# Altium PCB T_BIAS.PcbDoc
Units mm, origin at the board's own origin, x right, y up, seen from the top; angles counter-clockwise.
Board outline 15.11 x 16.64 mm, 2 copper layers (Top Layer, Bottom Layer), stack 0.871 mm thick; 2 components, 3 nets, 5 pads, 17 vias.
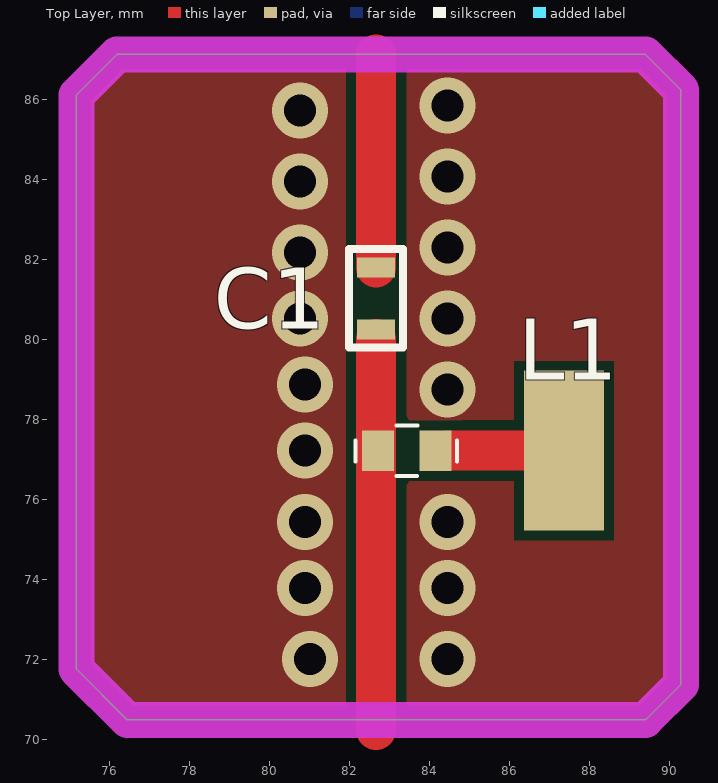
[diagram p0: Top Layer view]
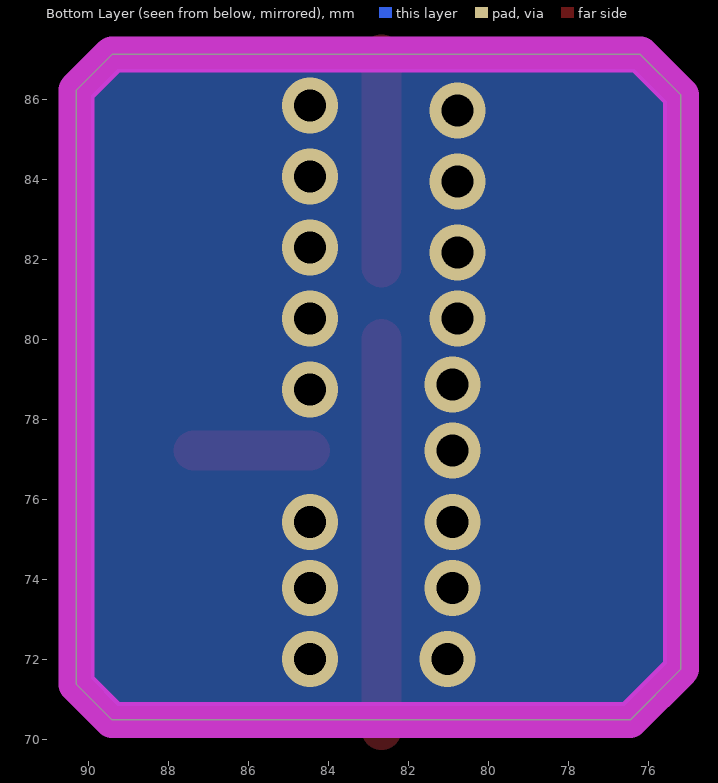
[diagram p1: Bottom Layer view, seen from below]

## Layer stack, top to bottom
Top Solder: solder mask 0.0102, Solder Resist, Dk 3.5
Top Layer: signal copper 0.0356
Dielectric 1: dielectric 0.8, FR-4, Dk 4.8
Bottom Layer: signal copper 0.0356
Bottom Solder: solder mask 0.0102, Solder Resist, Dk 3.5

## Board outline
75.184,71.755 75.184,86.106 76.2,87.122 89.408,87.122 90.297,86.233 90.297,71.374 89.408,70.485 76.454,70.485

## Design rules (kind name [scope] priority, off if disabled: settings)
Clearance Clearance_3 [OnLayer('Bottom Layer') vs OnLayer('Keep-Out Layer')] p1: gap=-0.1 ignorepadtopadclearanceinfootprint=FALSE
Clearance Clearance_2 [OnLayer('Top Layer') vs OnLayer('Keep-Out Layer')] p2: gap=-0.1 ignorepadtopadclearanceinfootprint=FALSE
Clearance Clearance_1 [InNetClass('RF') vs OnLayer('Keep-Out Layer')] p3: gap=-0.1 ignorepadtopadclearanceinfootprint=FALSE
Clearance [All] p4: gap=0.254 ignorepadtopadclearanceinfootprint=FALSE except(0: Arc-Hole Track-Hole SMDPad-Hole THPad-Hole Via-Hole Fill-Hole Poly-Hole Region-Hole Text-Hole)
PolygonConnect [All] p1: connectstyle=Relief reliefconductorwidth=0.254 reliefentries=4 polygonreliefangle="90 Angle" airgapwidth=0.254
RoutingVias [All] p1: holewidth=0.711 width=1.27 viastyle="Through Hole" minholewidth=0.711 minwidth=1.27 maxholewidth=0.711 maxwidth=1.27
SolderMaskExpansion [All] p1: expansion=0.102 istentingtop=FALSE
Width [All] p1: maxlimit=2.254 minlimit=0.254 preferedwidth=1
30 further rules are at their usual default settings.

## Classes and differential pairs
net class RF: +5 DC_BLOCK To_Antenna

## Components (designator, comment, footprint, x,y, rotation, side; value= is the part's Value field where it differs from the comment)
C1 "100pf" CAPC0603X08L 82.677,81.026 r90 top
L1 "56nH" INDC0603X102-2L 83.439,77.216 r0 top

## Footprints (in the part's own frame and the unit in brackets; to place one, negate y for a bottom-side part, rotate by r counter-clockwise, add the part's x,y. Pads: shape width x height; smd on the part's side, far side on the other; paste and mask are expansions set on the pad)
CAPC0603X08L [mm] "Chip Capacitor, 2-Leads, Body 1.60x0.80mm, IPC High Density"
  rect 0.5x0.95 smd: 1(-0.775,0) 2(0.775,0)
  silkscreen extent -1.23,-0.67 1.23,0.68, body extent -0.85,-0.45 0.85,0.45, height 0.8
INDC0603X102-2L [mm]
  rect 0.8x1.02 smd: 1(-0.72,0) 2(0.72,0)
  silkscreen extent -1.28,-0.64 1.26,0.64, body extent -0.9,-0.56 0.9,0.56, height 1.02

## Part data
C1: library part Capacitor2P-NP, "The capacitor have 2PIN in AXIAL and SMD models. / all non-polar models include.", Create Date=2022/07/25, Created For=HiroNegarPars, creator="Shahab Azmoodeh", Modified Date=2022/07/25, version=1.0
L1: library part Inductor2P, "generic smd and dip inductors", Create Date=12.09.2022, Created For="Hiro Negar", creator="Milad Mohammadi Bidhandi", Modify Date=13.09.2022, version=1.0

## Free pads (board coordinates)
  rect 2x4 smd: 2(87.376,77.216)

## Via types
v1: diameter 1.4, hole 0.8, Top Layer to Bottom Layer, 17 vias

## Nets (pads, with @x,y where several pads share a name; then routed paths per layer and width w, separated by ;. In a path a pad name is that pad's centre, name@x,y a point inside that pad or via, vN(x,y) a via of type N, cw(c..) or ccw(c..) an arc to the next point about the centre after c; other vN are vias at no path point)
+5: L1.2 pad.2 | length 2.9
  Top Layer w1: L1.2@84.455,77.216 pad.2
DC_BLOCK: C1.2 | length 5.3
  Top Layer w1: C1.2 82.677,87.122
To_Antenna: C1.1 L1.1 | length 9.8
  Top Layer w1: 82.677,70.231 C1.1@82.677,80.01
copper on no net:
  other v1: 81.026,72.009 84.455,72.009 80.899,73.787 84.455,73.787 80.899,75.438 84.455,75.438 80.899,77.216 84.455,78.74 80.899,78.867 80.772,80.518 84.455,80.518 80.772,82.169 84.455,82.296 80.772,83.947 84.455,84.074 80.772,85.725 84.455,85.852

## Polygon pours and split planes (outlines as drawn)
no net on Bottom Layer "NONET_L02_P000" (solid, pour order 0): 75.184,71.755 75.184,86.106 76.2,87.122 89.408,87.122 90.297,86.233 90.297,71.374 89.408,70.485 76.454,70.485
no net on Top Layer "NONET_L01_P002" (solid, pour order 2): 75.184,71.755 75.184,86.106 76.2,87.122 89.408,87.122 90.297,86.233 90.297,71.374 89.408,70.485 76.454,70.485

## Keep-outs
Keep-Out Layer:
  the board outline again, w0.9

## Other copper
Top Layer:
  pour cut-out: 83.406,80.755 81.948,80.755 81.948,81.591 83.406,81.591

## Silkscreen, mask and mechanical layers (free items; w line width, h text height)
Top Solder:
  rectangle: 80.137,70.739 85.217,87.249